# Altium PCB ver2.PcbDoc
Units mil, origin at the board's own origin, x right, y up, seen from the top; angles counter-clockwise.
Board outline 1725 x 2820 mil, 2 copper layers (Top Layer, Bottom Layer); 67 components, 39 nets, 250 pads, 7 vias.
Unrouted connection lines stored in the file: 7.
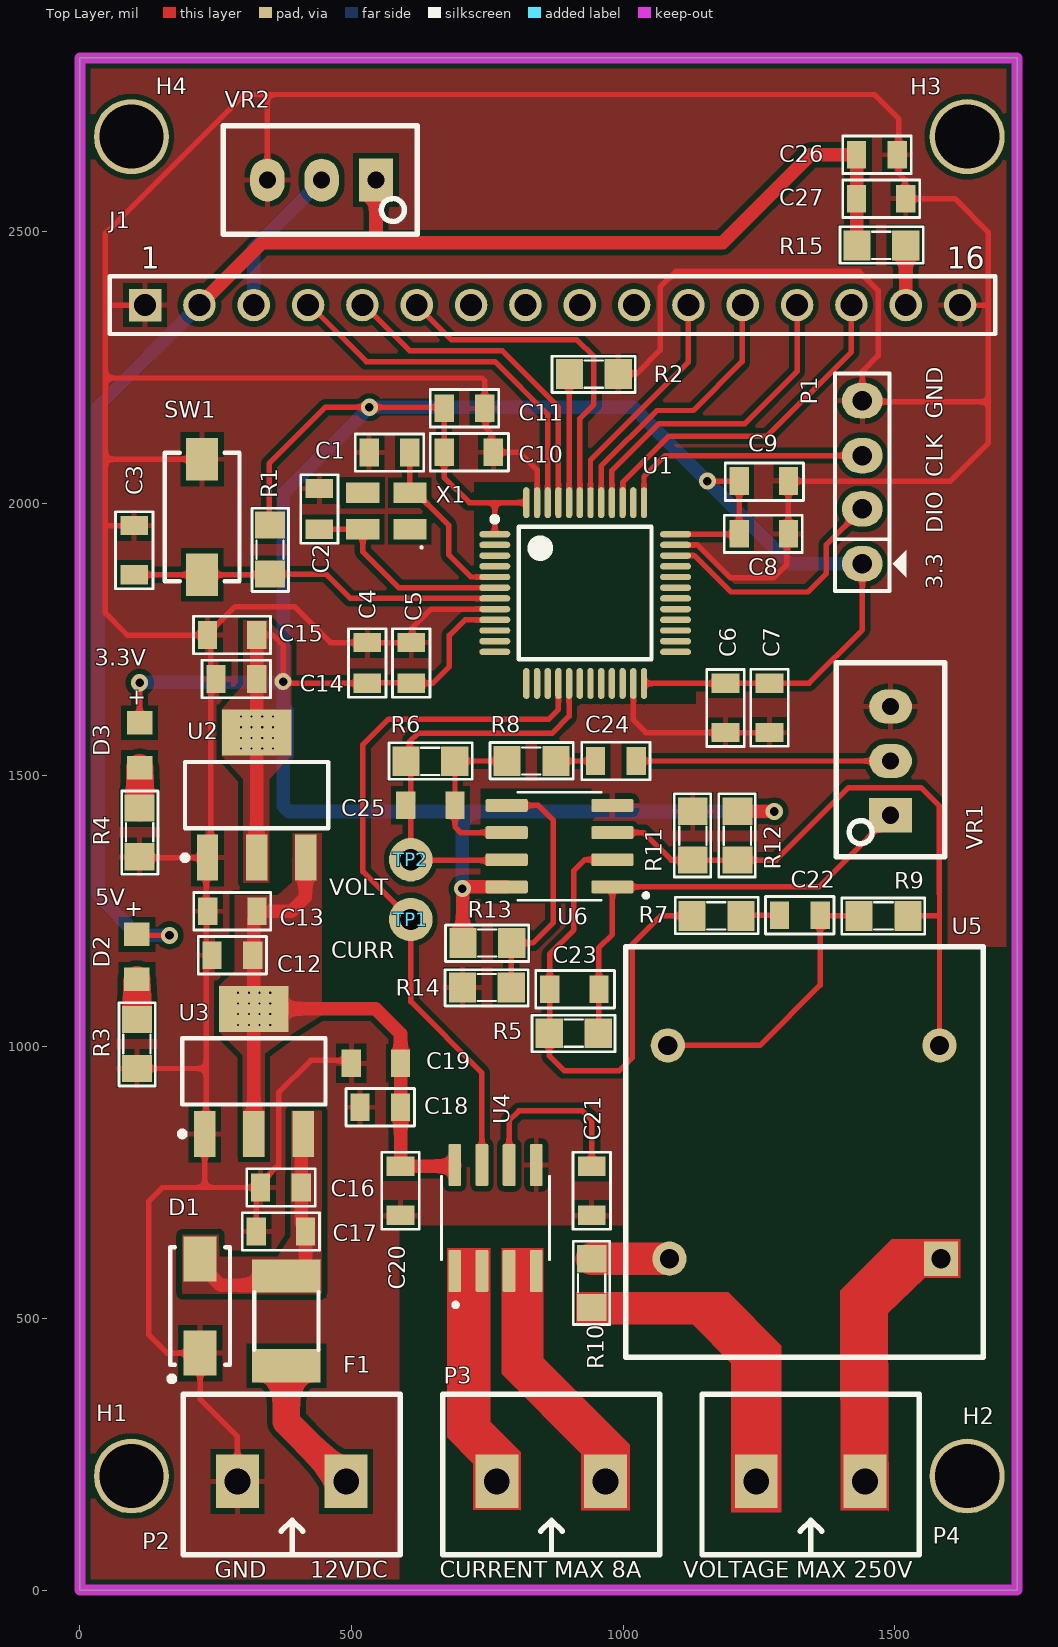
[diagram p0: Top Layer view]
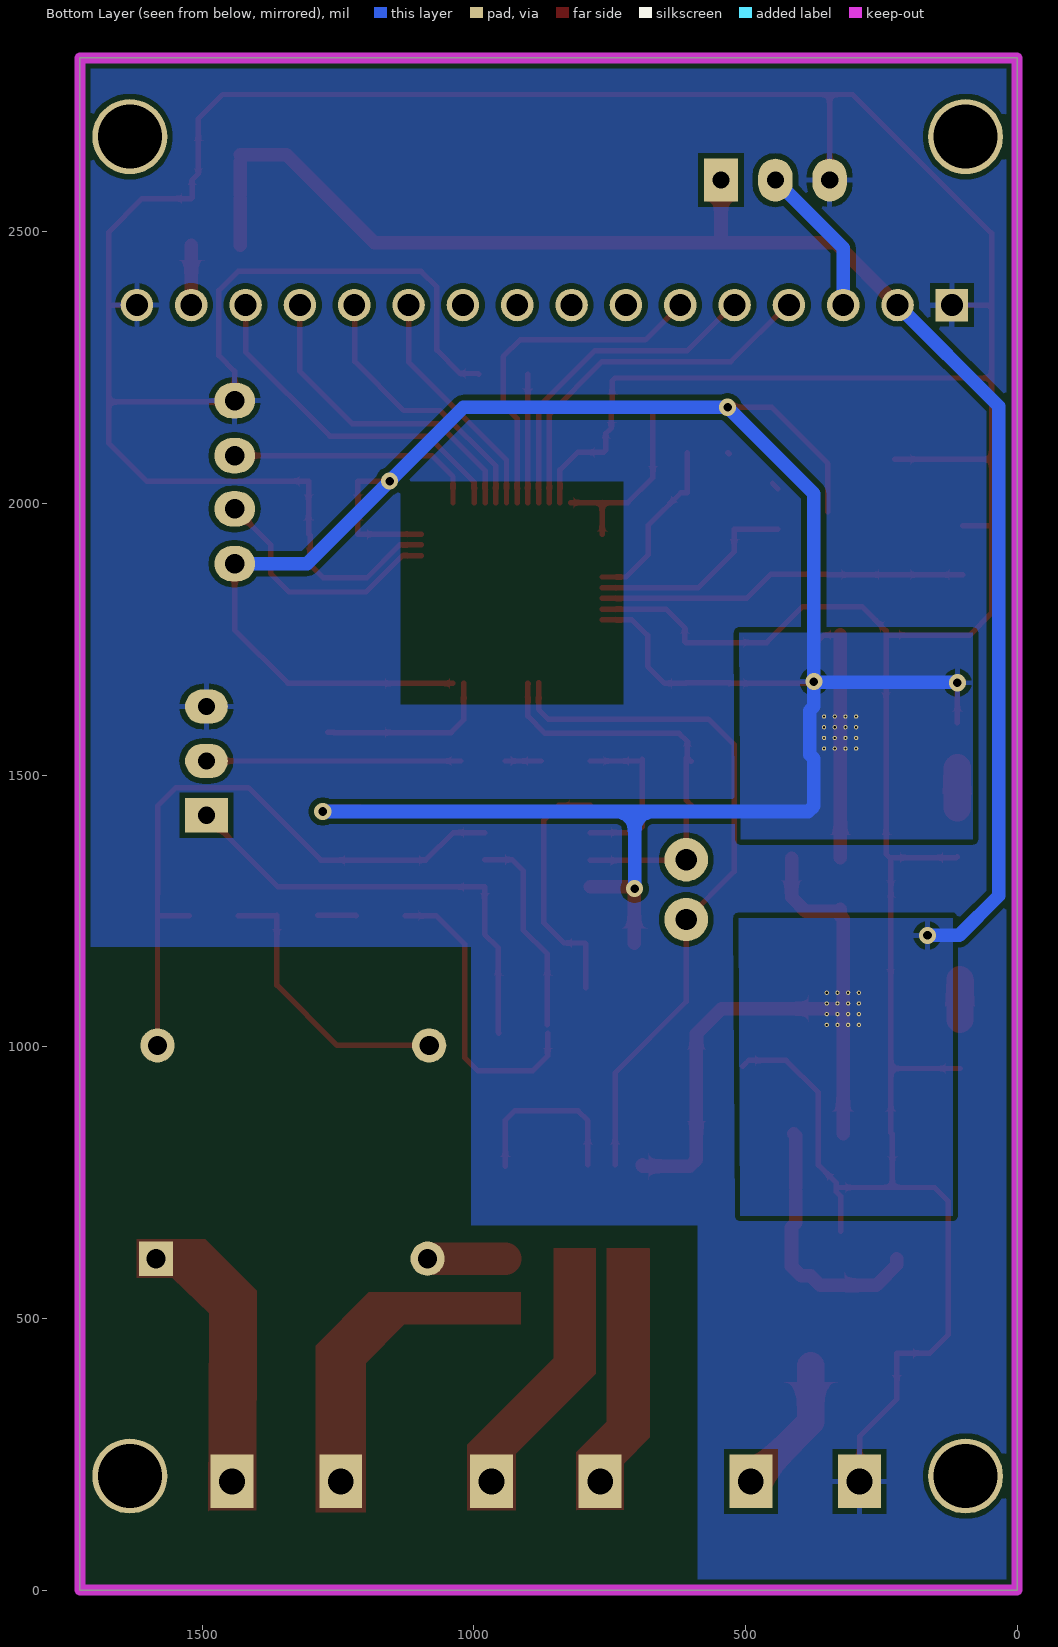
[diagram p1: Bottom Layer view, seen from below]
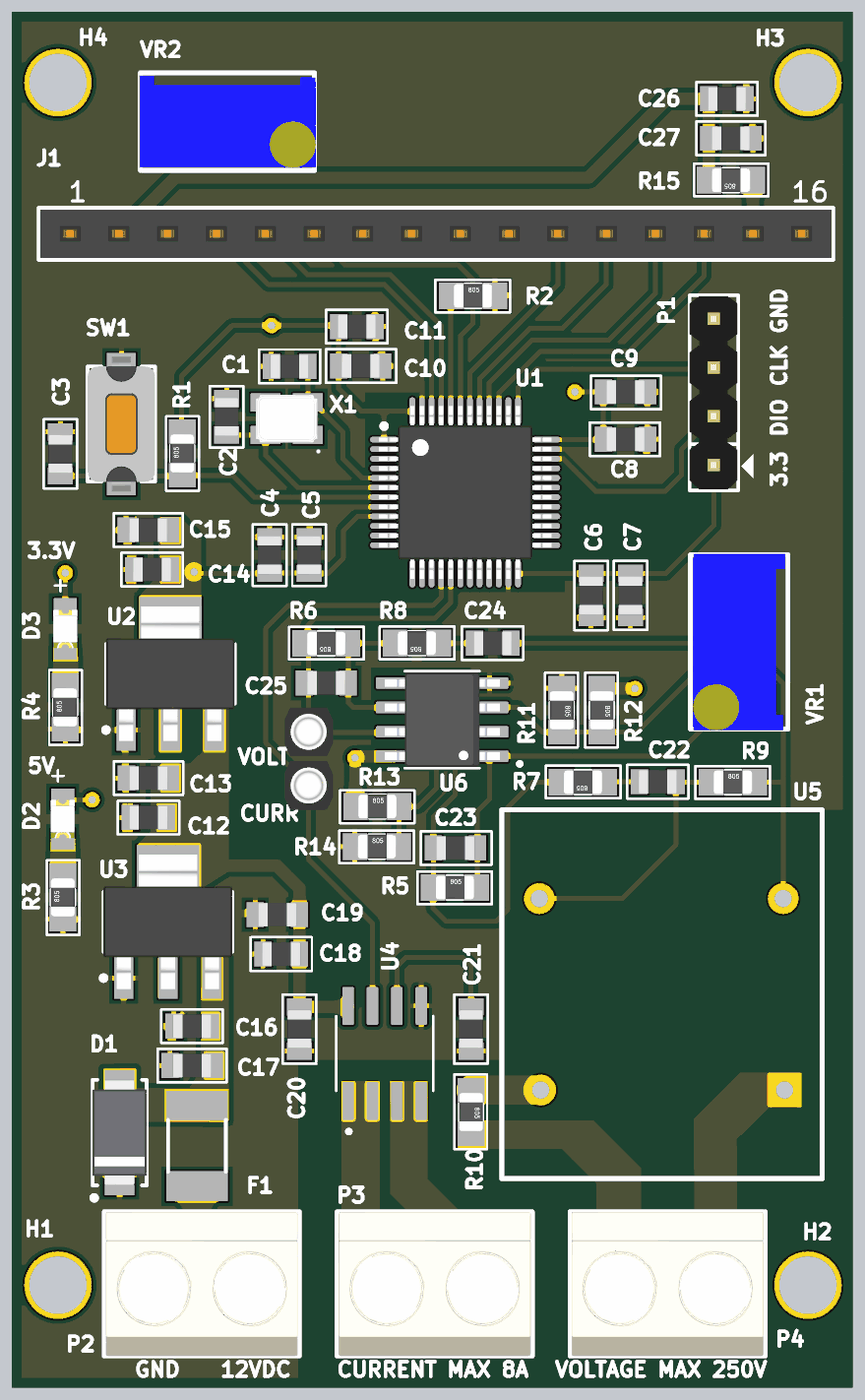
[diagram p2: 3D render of the assembled board from above, using the file's embedded part models]

## Layer stack, top to bottom
Top Solder: solder mask 0.4, Solder Resist, Dk 3.5
Top Layer: signal copper 1.4
Dielectric 1: dielectric 12.6, FR-4, Dk 4.8
Bottom Layer: signal copper 1.4
Bottom Solder: solder mask 0.4, Solder Resist, Dk 3.5

## Board outline
0,0 0,2820 1725,2820 1725,0

## Design rules (kind name [scope] priority, off if disabled: settings)
Clearance [All] p1: gap=10 ignorepadtopadclearanceinfootprint=TRUE
PolygonConnect PolygonConnect_14 [All vs IsNamedPolygon('NETP3_1_L01_P001')] p1: thpad.connectstyle=Direct thpad.reliefconductorwidth=10 thpad.reliefentries=4 thpad.polygonreliefangle="90 Angle" thpad.airgapwidth=10 smdpad.connectstyle=Direct smdpad.reliefconductorwidth=10 smdpad.reliefentries=4 smdpad.polygonreliefangle="90 Angle" smdpad.airgapwidth=10 via.connectstyle=Relief via.reliefconductorwidth=10 via.reliefentries=4 via.polygonreliefangle="90 Angle" via.airgapwidth=10
PolygonConnect PolygonConnect_13 [All vs IsNamedPolygon('+3.3_L01_P012')] p2: thpad.connectstyle=Relief thpad.reliefconductorwidth=10 thpad.reliefentries=4 thpad.polygonreliefangle="90 Angle" thpad.airgapwidth=10 smdpad.connectstyle=Direct smdpad.reliefconductorwidth=10 smdpad.reliefentries=4 smdpad.polygonreliefangle="90 Angle" smdpad.airgapwidth=10 via.connectstyle=Direct via.reliefconductorwidth=10 via.reliefentries=4 via.polygonreliefangle="90 Angle" via.airgapwidth=10
PolygonConnect PolygonConnect_12 [All vs IsNamedPolygon('+5_L01_P011')] p3: thpad.connectstyle=Relief thpad.reliefconductorwidth=10 thpad.reliefentries=4 thpad.polygonreliefangle="90 Angle" thpad.airgapwidth=10 smdpad.connectstyle=Direct smdpad.reliefconductorwidth=10 smdpad.reliefentries=4 smdpad.polygonreliefangle="90 Angle" smdpad.airgapwidth=10 via.connectstyle=Relief via.reliefconductorwidth=10 via.reliefentries=4 via.polygonreliefangle="90 Angle" via.airgapwidth=10
PolygonConnect PolygonConnect_11 [All vs IsNamedPolygon('+5_L01_P011')] p4: thpad.connectstyle=Relief thpad.reliefconductorwidth=10 thpad.reliefentries=4 thpad.polygonreliefangle="90 Angle" thpad.airgapwidth=10 smdpad.connectstyle=Direct smdpad.reliefconductorwidth=10 smdpad.reliefentries=4 smdpad.polygonreliefangle="90 Angle" smdpad.airgapwidth=10 via.connectstyle=Relief via.reliefconductorwidth=10 via.reliefentries=4 via.polygonreliefangle="90 Angle" via.airgapwidth=10
PolygonConnect PolygonConnect_10 [All vs IsNamedPolygon('VCC_9-12_L01_P010')] p5: thpad.connectstyle=Relief thpad.reliefconductorwidth=10 thpad.reliefentries=4 thpad.polygonreliefangle="90 Angle" thpad.airgapwidth=10 smdpad.connectstyle=Direct smdpad.reliefconductorwidth=10 smdpad.reliefentries=4 smdpad.polygonreliefangle="90 Angle" smdpad.airgapwidth=10 via.connectstyle=Relief via.reliefconductorwidth=10 via.reliefentries=4 via.polygonreliefangle="90 Angle" via.airgapwidth=10
PolygonConnect PolygonConnect_9 [All vs IsNamedPolygon('NETP3_2_L01_P000')] p6: thpad.connectstyle=Direct thpad.reliefconductorwidth=10 thpad.reliefentries=4 thpad.polygonreliefangle="90 Angle" thpad.airgapwidth=10 smdpad.connectstyle=Direct smdpad.reliefconductorwidth=10 smdpad.reliefentries=4 smdpad.polygonreliefangle="90 Angle" smdpad.airgapwidth=10 via.connectstyle=Relief via.reliefconductorwidth=10 via.reliefentries=4 via.polygonreliefangle="90 Angle" via.airgapwidth=10
PolygonConnect PolygonConnect_8 [All vs IsNamedPolygon('NETP3_2_L01_P000')] p7: thpad.connectstyle=Direct thpad.reliefconductorwidth=10 thpad.reliefentries=4 thpad.polygonreliefangle="90 Angle" thpad.airgapwidth=10 smdpad.connectstyle=Direct smdpad.reliefconductorwidth=10 smdpad.reliefentries=4 smdpad.polygonreliefangle="90 Angle" smdpad.airgapwidth=10 via.connectstyle=Relief via.reliefconductorwidth=10 via.reliefentries=4 via.polygonreliefangle="90 Angle" via.airgapwidth=10
PolygonConnect PolygonConnect_7 [All vs IsNamedPolygon('NETP4_2_L01_P009')] p8: thpad.connectstyle=Direct thpad.reliefconductorwidth=10 thpad.reliefentries=4 thpad.polygonreliefangle="90 Angle" thpad.airgapwidth=10 smdpad.connectstyle=Direct smdpad.reliefconductorwidth=10 smdpad.reliefentries=4 smdpad.polygonreliefangle="90 Angle" smdpad.airgapwidth=10 via.connectstyle=Relief via.reliefconductorwidth=10 via.reliefentries=4 via.polygonreliefangle="90 Angle" via.airgapwidth=10
PolygonConnect PolygonConnect_6 [All vs IsNamedPolygon('NETP4_1_L01_P008')] p9: thpad.connectstyle=Direct thpad.reliefconductorwidth=10 thpad.reliefentries=4 thpad.polygonreliefangle="90 Angle" thpad.airgapwidth=10 smdpad.connectstyle=Relief smdpad.reliefconductorwidth=10 smdpad.reliefentries=4 smdpad.polygonreliefangle="90 Angle" smdpad.airgapwidth=10 via.connectstyle=Relief via.reliefconductorwidth=10 via.reliefentries=4 via.polygonreliefangle="90 Angle" via.airgapwidth=10
PolygonConnect PolygonConnect_5 [All vs IsNamedPolygon('+3.3_L02_P006')] p10: thpad.connectstyle=Direct thpad.reliefconductorwidth=10 thpad.reliefentries=4 thpad.polygonreliefangle="90 Angle" thpad.airgapwidth=10 smdpad.connectstyle=Relief smdpad.reliefconductorwidth=10 smdpad.reliefentries=4 smdpad.polygonreliefangle="90 Angle" smdpad.airgapwidth=10 via.connectstyle=Relief via.reliefconductorwidth=10 via.reliefentries=4 via.polygonreliefangle="90 Angle" via.airgapwidth=10
PolygonConnect PolygonConnect_4 [All vs IsNamedPolygon('+5_L02_P005')] p11: thpad.connectstyle=Direct thpad.reliefconductorwidth=10 thpad.reliefentries=4 thpad.polygonreliefangle="90 Angle" thpad.airgapwidth=10 smdpad.connectstyle=Relief smdpad.reliefconductorwidth=10 smdpad.reliefentries=4 smdpad.polygonreliefangle="90 Angle" smdpad.airgapwidth=10 via.connectstyle=Relief via.reliefconductorwidth=10 via.reliefentries=4 via.polygonreliefangle="90 Angle" via.airgapwidth=10
PolygonConnect PolygonConnect_3 [All vs IsNamedPolygon('+5_L02_P005')] p12: thpad.connectstyle=Relief thpad.reliefconductorwidth=10 thpad.reliefentries=4 thpad.polygonreliefangle="90 Angle" thpad.airgapwidth=10 smdpad.connectstyle=Relief smdpad.reliefconductorwidth=10 smdpad.reliefentries=4 smdpad.polygonreliefangle="90 Angle" smdpad.airgapwidth=10 via.connectstyle=Direct via.reliefconductorwidth=10 via.reliefentries=4 via.polygonreliefangle="90 Angle" via.airgapwidth=10
PolygonConnect PolygonConnect_2 [All vs IsNamedPolygon('NONET_L01_P001')] p13: thpad.connectstyle=Direct thpad.reliefconductorwidth=10 thpad.reliefentries=4 thpad.polygonreliefangle="90 Angle" thpad.airgapwidth=10 smdpad.connectstyle=Direct smdpad.reliefconductorwidth=10 smdpad.reliefentries=4 smdpad.polygonreliefangle="90 Angle" smdpad.airgapwidth=10 via.connectstyle=Relief via.reliefconductorwidth=10 via.reliefentries=4 via.polygonreliefangle="90 Angle" via.airgapwidth=10
PolygonConnect PolygonConnect_1 [All vs IsNamedPolygon('NONET_L01_P000')] p14: thpad.connectstyle=Direct thpad.reliefconductorwidth=10 thpad.reliefentries=4 thpad.polygonreliefangle="90 Angle" thpad.airgapwidth=10 smdpad.connectstyle=Direct smdpad.reliefconductorwidth=10 smdpad.reliefentries=4 smdpad.polygonreliefangle="90 Angle" smdpad.airgapwidth=10 via.connectstyle=Relief via.reliefconductorwidth=10 via.reliefentries=4 via.polygonreliefangle="90 Angle" via.airgapwidth=10
PolygonConnect [All] p15: connectstyle=Relief reliefconductorwidth=10 reliefentries=4 polygonreliefangle="90 Angle" airgapwidth=10
RoutingVias [All] p1: holewidth=15.75 width=31.5 viastyle="Through Hole" minholewidth=15.75 minwidth=31.5 maxholewidth=15.75 maxwidth=31.5
SolderMaskExpansion [All] p1: expansion=4 istentingtop=FALSE
Width [All] p1: maxlimit=60 minlimit=10 preferedwidth=25
30 further rules are at their usual default settings.

## Classes and differential pairs
component class Power_Supply: C12 C13 C14 C15 C16 C17 C18 C19 D1 D2 D3 F1 P2 R3 R4 U2 U3
component class Measure: C20 C21 C22 C23 C24 C25 P3 P4 R5 R6 R7 R8 R9 R10 R11 R12 R13 R14 U4 U5 U6 VR1
component class MCU: C1 C2 C3 C4 C5 C6 C7 C8 C9 C10 C11 H1 H2 H3 H4 P1 R1 R2 SW1 TP1 TP2 X1
component class Display: C26 C27 J1 R15 VR2

## Components (designator, comment, footprint, x,y, rotation, side; value= is the part's Value field where it differs from the comment)
C1 "22pF, 50V" WCAP-CSGP_0805_H=0.6mm_Reflow 569.91,2093.45 r0 top
C2 "22pF, 50V" WCAP-CSGP_0805_H=0.6mm_Reflow 440.74,1989.94 r270 top
C3 "100nF, 50V" WCAP-CSGP_0805_H=0.8mm_Wave 100,1913.98 r270 top
C4 "1uF, 50V" WCAP-CSGP_0805_H=1.25mm 529.03,1706.41 r270 top
C5 "10nF, 50V" WCAP-CSGP_0805_H=0.8mm_Reflow 609.9,1706.41 r270 top
C6 "100nF, 50V" WCAP-CSGP_0805_H=0.8mm_Wave 1188.28,1623.54 r90 top
C7 "100nF, 50V" WCAP-CSGP_0805_H=0.8mm_Wave 1269.15,1623.82 r90 top
C8 "100nF, 50V" WCAP-CSGP_0805_H=0.8mm_Wave 1258.75,1944 r180 top
C9 "100nF, 50V" WCAP-CSGP_0805_H=0.8mm_Wave 1258.75,2041 r180 top
C10 "100nF, 50V" WCAP-CSGP_0805_H=0.8mm_Wave 715.74,2094.12 r180 top
C11 "10uF, 16V" WCAP-CSGP_0805_H=1.25mm 707.87,2175 r180 top
C12 "4.7uF, 25V" WCAP-CSGP_0805_H=1.25mm 280.66,1168.51 r0 top
C13 "100nF, 50V" WCAP-CSGP_0805_H=0.8mm_Wave 280.66,1249.39 r0 top
C14 "4.7uF, 25V" WCAP-CSGP_0805_H=1.25mm 287.98,1676.89 r0 top
C15 "100nF, 50V" WCAP-CSGP_0805_H=0.8mm_Wave 280.11,1757.76 r0 top
C16 "4.7uF, 25V" WCAP-CSGP_0805_H=1.25mm 370,741.01 r0 top
C17 "100nF, 50V" WCAP-CSGP_0805_H=0.8mm_Wave 370,660.13 r0 top
C18 "4.7uF, 25V" WCAP-CSGP_0805_H=1.25mm 552.83,888.75 r0 top
C19 "100nF, 50V" WCAP-CSGP_0805_H=0.8mm_Wave 544.96,969.63 r0 top
C20 "100nF, 50V" WCAP-CSGP_0805_H=0.8mm_Wave 590.24,735 r90 top
C21 "1nF, 50V" WCAP-CSGP_0805_H=0.8mm_Wave 942,735 r270 top
C22 "1uF, 50V" WCAP-CSGP_0805_H=1.25mm 1325,1242 r180 top
C23 "1nF, 50V" WCAP-CSGP_0805_H=0.8mm_Wave 910,1105.94 r0 top
C24 "1uF, 50V" WCAP-CSGP_0805_H=1.25mm 986.49,1526 r0 top
C25 "1nF, 50V" WCAP-CSGP_0805_H=0.8mm_Wave 645.08,1444.5 r0 top
C26 "4.7uF, 25V" WCAP-CSGP_0805_H=1.25mm 1466.85,2641.66 r180 top
C27 "100nF, 50V" WCAP-CSGP_0805_H=0.8mm_Wave 1474.72,2560.79 r180 top
D1 "D Schottky" SS34 221.39,522.86 r90 top
D2 "Red, 2V" WL-SMCW_0805 105,1165.36 r90 top
D3 "Green, 3.2V" WL-SMCW_0805 110,1555 r90 top
F1 "Fuse" "FUSE SMD" 380,495.6 r90 top
H1 "Hole" "LO KHOAN 3MM" 95,210 r0 top
H2 "Hole" "LO KHOAN 3MM" 1633.01,210 r0 top
H3 "Hole" "LO KHOAN 3MM" 1633.01,2675 r0 top
H4 "Hole" "LO KHOAN 3MM" 95,2675 r0 top
J1 "61301611821" 61301611821 870,2365 r0 top
P1 "Header 4" JP4 1440,1989 r90 top
P2 "Domino 2" "DOMINO 2- 5mm" 390,200 r180 top
P3 "Domino 2" "DOMINO 2- 5mm" 867.5,200 r180 top
P4 "Domino 2" "DOMINO 2- 5mm" 1345,200 r180 top
R1 "RESISTOR SMD" RES-SM-0805 350,1870 r90 top value=10K/1%/0805
R2 "RESISTOR SMD" RES-SM-0805 901,2238 r0 top value=10K/1%/0805
R3 "RESISTOR SMD" RES-SM-0805 105,960 r90 top value=1k/1%/0805
R4 "RESISTOR SMD" RES-SM-0805 110,1349.64 r90 top value=470/1%/0805
R5 "RESISTOR SMD" RES-SM-0805 864,1025 r0 top value=100k/1%/0805
R6 "RESISTOR SMD" RES-SM-0805 690.1,1525.45 r180 top value=10k/1%/0805
R7 "RESISTOR SMD" RES-SM-0805 1216.51,1241 r180 top value=10k/1%/0805
R8 "RESISTOR SMD" RES-SM-0805 876,1526 r180 top value=10k/1%/0805
R9 "RESISTOR SMD" RES-SM-0805 1434,1241 r0 top value=100/1%/0805
R10 "RESISTOR SMD" RES-SM-0805 942,610 r270 top value=820K/5%/0805
R11 "RESISTOR SMD" RES-SM-0805 1210.01,1433.49 r270 top value=10k/1%/0805
R12 "RESISTOR SMD" RES-SM-0805 1128,1433.49 r270 top value=10k/1%/0805
R13 "RESISTOR SMD" RES-SM-0805 705,1191 r0 top value=10k/1%/0805
R14 "RESISTOR SMD" RES-SM-0805 704,1108.99 r0 top value=10k/1%/0805
R15 "RESISTOR SMD" RES-SM-0805 1520,2475 r180 top value=330/1%/0805
SW1 "434123050816" WS-TASV_L6W3.5H5_4341x30508x6 225,1975 r90 top
TP1 "Test Point" TP 609,1234.23 r0 top
TP2 "Test Point" TP 609,1344.24 r0 top
U1 "STM32F103C8T6" TSQFP50P900X900X160-48N 930,1835 r0 top
U2 "AMS1117-3.3V" SOT230P700X180-4N 325.38,1463.14 r90 top
U3 "AMS1117-5V" SOT230P700X180-4N 320.38,954.76 r90 top
U4 "ACS712-20" SOIC127P600X175-8N 765,685 r90 top
U5 "ZMPT101B" ZMPT101B 1333.56,806.26 r270 top
U6 "TL072" DIP794W45P254L1060H508Q8 882.79,1369.24 r180 top
VR1 "10K" "VARISTOR 2" 1492,1526 r90 top value="VR 100K"
VR2 "10K" "VARISTOR 2" 445,2595 r180 top value="VR 10K"
X1 "XTAL/8MHz/3225" "XTAL 3225" 564,1986 r180 top value=16MHz

## Footprints (in the part's own frame and the unit in brackets; to place one, negate y for a bottom-side part, rotate by r counter-clockwise, add the part's x,y. Pads: shape width x height; smd on the part's side, far side on the other; paste and mask are expansions set on the pad)
61301611821 [mm] "Socket Header, Pitch 2.54 mm, THT, Vertical, single row, 16p"
  rect 1.52x1.52 hole 1.02: 1(-19.05,0)
  round 1.52 hole 1.02: 2(-16.51,0) 3(-13.97,0) 4(-11.43,0) 5(-8.89,0) 6(-6.35,0) 7(-3.81,0) 8(-1.27,0) 9(1.27,0) 10(3.81,0) 11(6.35,0) 12(8.89,0) 13(11.43,0) 14(13.97,0) 15(16.51,0) 16(19.05,0)
  silkscreen extent -20.7,-1.35 20.7,1.35, body extent -20.57,-1.25 20.57,1.25, height 8.55
DIP794W45P254L1060H508Q8 [mm]
  rrect25% 1.97x0.6 smd: 1(-2.47,1.905) 2(-2.47,0.635) 3(-2.47,-0.635) 4(-2.47,-1.905) 5(2.47,-1.905) 6(2.47,-0.635) 7(2.47,0.635) 8(2.47,1.905)
  silkscreen extent -4.14,-2.52 1.95,2.52, body extent -3,-2.45 3,2.45, height 1.75
"DOMINO 2- 5mm" [mm]
  rect 2x2.5 hole 1.2: 1(-2.54,0) 2(2.54,0)
  silkscreen extent -5.08,-4.08 5.08,3.43, body extent -5,-4.07 5,3.43, height 10
"FUSE SMD" [mm] "SMD FUSE"
  rect 1.55x3.21 smd: 1(-2.1,0) 2(2.1,0)
  silkscreen extent -1.35,-1.5 1.35,1.51, body extent -2.37,-1.71 2.36,1.71, height 0.75
JP4 [mil] "Jumper 4"
  oval 65x75 hole 36: 1(-100,0) 2(1,0) 3(99,0) 4(200,0)
  silkscreen extent -150,-81 250,50, body extent -148,-48 248,50, height 323
"LO KHOAN 3MM" [mil]
  round 138 hole 118.1: 1(0,0)
RES-SM-0805 [mil]
  rect 50x55 smd: 1(0,0) 2(90,0)
  silkscreen extent -32,-34 121,33, body extent 6,-25 84,25, height 31
SOIC127P600X175-8N [mm]
  rrect25% 1.97x0.6 smd: 1(-2.475,1.905) 2(-2.475,0.635) 3(-2.475,-0.635) 4(-2.475,-1.905) 5(2.475,-1.905) 6(2.475,-0.635) 7(2.475,0.635) 8(2.475,1.905)
  silkscreen extent -4.16,-2.52 1.95,2.52
SOT230P700X180-4N [mm] "SOT223, 4-Leads, Body 6.50x7.00mm (avg), Pitch 2.30mm, IPC Medium Density"
  rect 2.15x1 smd: 1(-2.925,2.3) 2(-2.925,0) 3(-2.925,-2.3)
  round 0.2 hole 0.1 paste+0 mask+0.102: 4(2.175,-0.762) 4(2.175,-0.262) 4(2.175,0.238) 4(2.175,0.738) 4(2.675,-0.762) 4(2.675,-0.762) 4(2.675,-0.262) 4(2.675,0.238) 4(2.675,0.738) 4(3.175,-0.762) 4(3.175,-0.762) 4(3.175,-0.262) 4(3.175,0.238) 4(3.175,0.738) 4(3.675,-0.762) 4(3.675,-0.762) 4(3.675,-0.262) 4(3.675,0.238) 4(3.675,0.738)
  rect 2.15x3.25 smd: 4(2.925,0)
  silkscreen extent -3.05,-3.35 1.55,3.47, body extent -3.5,-3.35 3.5,3.35, height 1.8
SS34 [mm] "DO-214-AC/SMA Molded Diode, Body 5.3x2.6mm, IPC Medium Density"
  rect 2.1x1.55 smd: A(-2.2,0) K(2.2,0)
  silkscreen extent -3.52,-1.4 2.75,1.45, body extent -2.75,-1.4 2.75,1.4, height 2.3
TP [mil] "Connect 1"
  round 80 hole 39: TP1(0,0)
  body extent -50,-50 50,50, height 179
TSQFP50P900X900X160-48N [mm] "TSQFP, 48-Leads, Body 7.00x7.00mm, Pitch 0.50mm, IPC Medium Density"
  oval 1.45x0.3 smd: 1(-4.225,2.75) 2(-4.225,2.25) 3(-4.225,1.75) 4(-4.225,1.25) 5(-4.225,0.75) 6(-4.225,0.25) 7(-4.225,-0.25) 8(-4.225,-0.75) 9(-4.225,-1.25) 10(-4.225,-1.75) 11(-4.225,-2.25) 12(-4.225,-2.75) 25(4.225,-2.75) 26(4.225,-2.25) 27(4.225,-1.75) 28(4.225,-1.25) 29(4.225,-0.75) 30(4.225,-0.25) 31(4.225,0.25) 32(4.225,0.75) 33(4.225,1.25) 34(4.225,1.75) 35(4.225,2.25) 36(4.225,2.75)
  oval 0.3x1.45 smd: 13(-2.75,-4.225) 14(-2.25,-4.225) 15(-1.75,-4.225) 16(-1.25,-4.225) 17(-0.75,-4.225) 18(-0.25,-4.225) 19(0.25,-4.225) 20(0.75,-4.225) 21(1.25,-4.225) 22(1.75,-4.225) 23(2.25,-4.225) 24(2.75,-4.225) 37(2.75,4.225) 38(2.25,4.225) 39(1.75,4.225) 40(1.25,4.225) 41(0.75,4.225) 42(0.25,4.225) 43(-0.25,4.225) 44(-0.75,4.225) 45(-1.25,4.225) 46(-1.75,4.225) 47(-2.25,4.225) 48(-2.75,4.225)
  silkscreen extent -4.35,-3.1 3.1,3.57, body extent -4.5,-4.5 4.5,4.5, height 1.6
"VARISTOR 2" [mm] "Resistor Variable"
  rect 1.6x2 hole 0.8: 1(-2.54,0)
  oval 1.6x2 hole 0.8: 2(0,0) 3(2.54,0)
  silkscreen extent -4.47,-2.54 4.6,2.54, body extent -4.54,-2.4 4.66,2.4, height 12.02
WCAP-CSGP_0805_H=0.6mm_Reflow [mm] "Ceramic Capacitors, body 2x1.25mm"
  rect 0.9x1.3 smd: 1(-0.95,0) 2(0.95,0)
  body extent -1,-0.62 1,0.63, height 0.6
WCAP-CSGP_0805_H=0.8mm_Reflow [mm] "Ceramic Capacitors, body 2x1.25mm"
  rect 0.9x1.3 smd: 1(-0.95,0) 2(0.95,0)
  body extent -1,-0.62 1,0.63, height 0.8
WCAP-CSGP_0805_H=0.8mm_Wave [mm] "Ceramic Capacitors, body 2x1.25mm"
  rect 0.9x1.3 smd: 1(-1.15,0) 2(1.15,0)
  body extent -1,-0.62 1,0.63, height 0.8
WCAP-CSGP_0805_H=1.25mm [mm] "Ceramic Capacitors, body 2x1.25mm"
  rect 0.9x1.3 smd: 1(-0.95,0) 2(0.95,0)
  body extent -1,-0.62 1,0.63, height 1.25
WL-SMCW_0805 [mm] "SMD Mono-color Chip LED, body 2.0x1.25mm"
  rect 1.1x1.2 smd: 1(-1.05,0) 2(1.05,0)
  body extent -1,-0.63 1,0.62, height 0.7
WS-TASV_L6W3.5H5_4341x30508x6 [mm] "SMD Tact Switch, body 6x3.5mm"
  rect 2x1.5 smd: 1(-2.7,0) 2(2.7,0)
  silkscreen extent -3,-1.75 3,1.75, body extent -3.65,-1.75 3.65,1.75, height 5
"XTAL 3225" [mm]
  rect 1.55x0.95 smd: 1(-1.1,-0.85) 2(1.1,-0.85) 3(1.1,0.85) 4(-1.1,0.85)
  silkscreen extent -1.7,1.65 -1.6,1.75, body extent -1.6,-1.25 1.6,1.25, height 0.55
ZMPT101B [mm]
  rect 1.6x1.6 hole 0.9: 1(4.985,6.387)
  round 1.6 hole 0.9: 2(4.985,-6.313) 3(-4.985,-6.387) 4(-4.985,6.313)
  silkscreen extent -9.6,-8.35 9.6,8.35

## Part data
C1 C2: library part 885012007053, "WCAP-CSGP Multilayer Ceramic Chip Capacitor, General Purpose, size 0805, NP0, 22pF, 50V", Capacitance=22pF, Capacitance Tolerance=+/-5%, Isolation Resistance=>=10GOhm, Manufacturer="Wurth Elektronik", Operating Temperature="-55 to +125degC", Rated Voltage=50VDC, Ceramic Type=NP0, ComponentLink1Description=Manufacturer, ComponentLink1URL=http://www.we-online.de, ComponentLink2Description=Datasheet, ComponentLink2URL=https://www.we-online.com/catalog/datasheet/885012007053.pdf, Dissipation Factor=Q>=400+20C, Height=0.6mm, Manufacturer Part Number=885012007053, Mounting Technology=SMT, Packaging="Tape and Reel", Published Date="May 2020", Size=0805, Technical Reference=NP00805220J050DFCT10000
C3 C6 C7 C8 C9 C10 C13 C15 C17 C19 C20 C27: library part 885012207098, "WCAP-CSGP Multilayer Ceramic Chip Capacitor, General Purpose, size 0805, X7R, 100nF, 50V", Capacitance=100nF, Capacitance Tolerance=+/-10%, Isolation Resistance=>=5GOhm, Manufacturer="Wurth Elektronik", Operating Temperature="-55 to +125degC", Rated Voltage=50VDC, Ceramic Type=X7R, ComponentLink1Description=Manufacturer, ComponentLink1URL=http://www.we-online.de, ComponentLink2Description=Datasheet, ComponentLink2URL=https://www.we-online.com/catalog/datasheet/885012207098.pdf, Dissipation Factor=#NAME?, Height=0.8mm, Manufacturer Part Number=885012207098, Mounting Technology=SMT, Packaging="Tape and Reel", Published Date="May 2020", Size=0805, Technical Reference=X7R0805104K050DFCT10000
C4 C22 C24: library part 885012207103, "WCAP-CSGP Multilayer Ceramic Chip Capacitor, General Purpose, size 0805, X7R, 1uF, 50V", Capacitance=1uF, Capacitance Tolerance=+/-10%, Isolation Resistance=>=0.1GOhm, Manufacturer="Wurth Elektronik", Operating Temperature="-55 to +125degC", Rated Voltage=50VDC, Ceramic Type=X7R, ComponentLink1Description=Manufacturer, ComponentLink1URL=http://www.we-online.de, ComponentLink2Description=Datasheet, ComponentLink2URL=https://www.we-online.com/catalog/datasheet/885012207103.pdf, Dissipation Factor=#NAME?, Height=1.25mm, Manufacturer Part Number=885012207103, Mounting Technology=SMT, Packaging="Tape and Reel", Published Date="May 2020", Size=0805, Technical Reference=X7R0805105K050DFCT10000
C5: library part 885012207092, "WCAP-CSGP Multilayer Ceramic Chip Capacitor, General Purpose, size 0805, X7R, 10nF, 50V", Capacitance=10nF, Capacitance Tolerance=+/-10%, Isolation Resistance=>=10GOhm, Manufacturer="Wurth Elektronik", Operating Temperature="-55 to +125degC", Rated Voltage=50VDC, Ceramic Type=X7R, ComponentLink1Description=Manufacturer, ComponentLink1URL=http://www.we-online.de, ComponentLink2Description=Datasheet, ComponentLink2URL=https://www.we-online.com/catalog/datasheet/885012207092.pdf, Dissipation Factor=#NAME?, Height=0.8mm, Manufacturer Part Number=885012207092, Mounting Technology=SMT, Packaging="Tape and Reel", Published Date="May 2020", Size=0805, Technical Reference=X7R0805103K050DFCT10000
C11: library part 885012107014, "WCAP-CSGP Multilayer Ceramic Chip Capacitor, General Purpose, size 0805, X5R, 10uF, 16V", Capacitance=10uF, Capacitance Tolerance=+/-20%, Isolation Resistance=>=0.005GOhm, Manufacturer="Wurth Elektronik", Operating Temperature="-55 to +85degC", Rated Voltage=16VDC, Ceramic Type=X5R, ComponentLink1Description=Manufacturer, ComponentLink1URL=http://www.we-online.de, ComponentLink2Description=Datasheet, ComponentLink2URL=https://www.we-online.com/catalog/datasheet/885012107014.pdf, Dissipation Factor=#NAME?, Height=1.25mm, Manufacturer Part Number=885012107014, Mounting Technology=SMT, Packaging="Tape and Reel", Published Date="May 2020", Size=0805, Technical Reference=X5R0805106M016DFCT10000
C12 C14 C16 C18 C26: library part 885012107018, "WCAP-CSGP Multilayer Ceramic Chip Capacitor, General Purpose, size 0805, X5R, 4.7uF, 25V", Capacitance=4.7uF, Capacitance Tolerance=+/-20%, Isolation Resistance=>=0.02GOhm, Manufacturer="Wurth Elektronik", Operating Temperature="-55 to +85degC", Rated Voltage=25VDC, Ceramic Type=X5R, ComponentLink1Description=Manufacturer, ComponentLink1URL=http://www.we-online.de, ComponentLink2Description=Datasheet, ComponentLink2URL=https://www.we-online.com/catalog/datasheet/885012107018.pdf, Dissipation Factor=#NAME?, Height=1.25mm, Manufacturer Part Number=885012107018, Mounting Technology=SMT, Packaging="Tape and Reel", Published Date="May 2020", Size=0805, Technical Reference=X5R0805475M025DFCT10000
C21 C23 C25: library part 885012007063, "WCAP-CSGP Multilayer Ceramic Chip Capacitor, General Purpose, size 0805, NP0, 1nF, 50V", Capacitance=1nF, Capacitance Tolerance=+/-5%, Isolation Resistance=>=10GOhm, Manufacturer="Wurth Elektronik", Operating Temperature="-55 to +125degC", Rated Voltage=50VDC, Ceramic Type=NP0, ComponentLink1Description=Manufacturer, ComponentLink1URL=http://www.we-online.de, ComponentLink2Description=Datasheet, ComponentLink2URL=https://www.we-online.com/catalog/datasheet/885012007063.pdf, Dissipation Factor=Q>=1000, Height=0.8mm, Manufacturer Part Number=885012007063, Mounting Technology=SMT, Packaging="Tape and Reel", Published Date="May 2020", Size=0805, Technical Reference=NP00805102J050DFCT10000
D1: "Schottky Diode", Supplier Part Number 1=SS34, Code_JEDEC=DO-214-AA, LatestRevisionDate=17-Jul-2002, LatestRevisionNote="Re-released for DXP Platform.", PackageDescription="DO-214-AA/SMB; 2 C-Bend Leads; Body 5.3 x 3.6 mm, inc. leads (LxW)", PackageReference=SMB, Published=8-Jun-2000, Publisher="Altium Limited", Supplier 1="Arrow Electronics", Supplier 2=RSComponents, Supplier Part Number 2=8080433
D2: library part 150080RS75000, "WL-SMCW SMT Mono-color Chip LED Waterclear, size 0805, Red, 2V, 140deg", Emitting Color=Red, Forward Voltage typ.=2V, Operating Temperature="-40 to +85degC", Chip Technology=AlInGaP, ComponentLink1Description=Manufacturer, ComponentLink1URL=http://www.we-online.de, ComponentLink2Description=Datasheet, ComponentLink2URL=https://www.we-online.com/catalog/datasheet/150080RS75000.pdf, Dominant Wavelength typ.=625nm, Luminous Intensity typ.=150mcd, Mounting Technology=SMT, Packaging="Tape and Reel", Part Number=150080RS75000, Peak Wavelength typ.=630nm, Published Date="December 2019", Publisher="Wurth Elektronik", Size=0805, Viewing Angle=140deg
D3: library part 150080GS75000, "WL-SMCW SMT Mono-color Chip LED Waterclear, size 0805, Green, 3.2V, 140deg", Emitting Color=Green, Forward Voltage typ.=3.2V, Operating Temperature="-40 to +85degC", Chip Technology=InGaN, ComponentLink1Description=Manufacturer, ComponentLink1URL=http://www.we-online.de, ComponentLink2Description=Datasheet, ComponentLink2URL=https://www.we-online.com/catalog/datasheet/150080GS75000.pdf, Dominant Wavelength typ.=525nm, Luminous Intensity typ.=450mcd, Mounting Technology=SMT, Packaging="Tape and Reel", Part Number=150080GS75000, Peak Wavelength typ.=515nm, Published Date="December 2019", Publisher="Wurth Elektronik", Size=0805, Viewing Angle=140deg
H1 H2 H3 H4: "Hole 3mm"
J1: "WR-PHD Socket Header, THT, pitch 2.54mm, Single Row, Vertical, 16p", Contact Resistance=20mOhm, Manufacturer="Wurth Elektronik", Operating Temperature="-40 to +125degC", Rated Current=3A, Withstanding Voltage=500VAC, Working Voltage=250VAC, ComponentLink1Description=Manufacturer, ComponentLink1URL=http://www.we-online.de, ComponentLink2Description=Datasheet, ComponentLink2URL=https://www.we-online.com/catalog/datasheet/61301611821.pdf, Gender="Socket Header", Manufacturer Part Number=61301611821, Mounting Technology=THT, Orientation=Vertical, Packaging=Tray, Pin Number=16, Pitch=2.54mm, Published Date="May 2020", Row Number=Single
P1: "Header, 4-Pin", LatestRevisionDate=17-Jul-2002, LatestRevisionNote="Re-released for DXP Platform.", Publisher="Altium Limited"
P2 P3 P4: "Domino, 2-Pin", LatestRevisionDate=17-Jul-2002, LatestRevisionNote="Re-released for DXP Platform.", Publisher="Altium Limited"
R1 R2 R3 R4 R5 R6 R7 R8 R9 R10 R11 R12 R13 R14 R15: "Resistor"
SW1: "WS-TASV J-Bend SMT Tact Switch, 12VDC, 50mA, 160g, height 5mm", Actuator Color=Black, Manufacturer="Wurth Elektronik", Operating Temperature max.=85C, Operating Temperature min.=-40C, Rated Current=50mA, Rated Voltage=12V, ComponentLink1Description="Manufacturer Link", ComponentLink1URL=http://www.we-online.de, ComponentLink2Description=Datasheet, ComponentLink2URL=https://www.we-online.com/catalog/datasheet/434123050816.pdf, Contact Material="Stainless Steel", Contact Plating=Silver, Electrical Life=50000Cycles, Height=5mm, Length=6mm, Manufacturer Part Number=434123050816, Mounting Technology=SMT, Operation Force=160g, Packaging="Tape and Reel", Terminal Material="Copper Alloy", Terminal Plating=Silver, Washable=No, Width=3.5mm
U1: Manufacturer=ST, ComponentLink1Description="Supplier 1 Link"
U4: "ACS712: IC de sensor de corriente lineal basado en efecto Hall totalmente integrado con aislamiento de voltaje de 2,1 kV RMS y un conductor de corriente de baja resistencia", Package=None, Availability="In Stock", Check_prices=https://www.snapeda.com/parts/ACS712-20/Analog+Devices/view-part/?ref=eda, MF="Analog Devices", MP=ACS712-20, Price=None, SnapEDA_Link=https://www.snapeda.com/parts/ACS712-20/Analog+Devices/view-part/?ref=snap
U5: "Minuscule 2mA/2mA Precision Voltage Transformer"
U6: "J-FET Amplifier 2 Circuit 8-SO", Package="SOIC-8 STMicroelectronics", Availability=Unavailable, MF=STMicroelectronics, MP=TL072, Price=None, SnapEDA_Link=https://www.snapeda.com/parts/TL072/STMicroelectronics/view-part/1499677/?ref=snap
VR1 VR2: library part "Var Resistor", "Var Resistor"
X1: library part XTAL

## Via types
v1: diameter 31.5, hole 15.75, Top Layer to Bottom Layer, 7 vias

## Nets (pads, with @x,y where several pads share a name; then routed paths per layer and width w, separated by ;. In a path a pad name is that pad's centre, name@x,y a point inside that pad or via, vN(x,y) a via of type N, cw(c..) or ccw(c..) an arc to the next point about the centre after c; other vN are vias at no path point)
+3.3: C4.2 C5.2 C6.2 C7.2 C8.2 C9.2 C10.2 C11.2 C14.2 C15.2 D3.2 P1.1 R1.2 R11.1 R13.1 U1.1 U1.9 U1.24 U1.36 U1.48 U2.2 U2.4 U6.8 | length 6110.4
  Top Layer w10: D3.2 v1(110,1670) ; C15.2@331.79,1757.76 355.24,1757.76 374,1739 v1(374,1672) ; 348.27,1985 348.27,2073.27 452,2177 668.47,2177 C11.2 C10.2 670.47,2047.53 716.66,2001.34 763.66,2001.34 ; v1@376.99,1669.01 C4.2 C4.2@530,1668.04 ; C4.2@529.03,1670 C5.2@610,1670 ; C5.2 649.01,1669.01 680,1700 680,1757 708.79,1785.79 U1.9 ; U1.1 763.66,2001.34 ; U1.48 763.66,2001.34 ; U1.24 1296.15,1668.66 ; U1.36 C8.2@1214,1943.27 ; v1(1155,2041) C9.2 ; C8.2 C9.2 ; C9.2@1214,2041 C9.2 ; 1296.15,1669.1 1342.1,1669.1 1440,1767 P1.1@1440,1882
  Top Layer w25: U2.2 C15.2 ; R13.1 704.5,1191.5 704.5,1290.5 v1(704,1291) 705.76,1291 709,1294.24 U6.8 ; R11.1 1277.51,1433.49 v1(1278,1433)
  Bottom Layer w25: v1(110,1670) 111,1671 373,1671 v1(374,1672) ; v1(704,1291) 704,1433 ; v1(1278,1433) 704,1433 ; P1.1 1307,1889 1019,2177 v1(533,2177) 374,2018 v1(374,1672) ; v1(374,1672) 374,1626.59 381.82,1618.77 381.82,1537.81 374,1529.99 374,1443.25 384.25,1433 704,1433
+5: C12.2 C13.2 C18.2 C19.2 C20.2 C26.2 C27.2 D2.2 J1.2 R15.2 U2.3 U3.2 U3.4 U4.8 VR2.1 | length 4186.8
  Top Layer w10: D2.2 106.7,1205 v1(165,1205)
  Top Layer w25: J1.2 335,2480 547,2480 ; U3.2 U3.4@320.38,1069.92 ; C13.2 389.39,1249.39 415,1275 U2.3@415,1347.04 ; C13.2@325.93,1252.78 325.93,1241.51 320.38,1235.96 U3.4@320.38,1069.92 ; VR2.1@544.77,2594.77 VR2.1 545,2482 547,2480 ; U4.8 690,780.96 689.31,780.28 602.43,780.28 590.24,792.47 C18.2 590.24,1023.76 544.08,1069.92 U3.4@320.38,1069.92 ; C27.2 1429.72,2560.51 1429.72,2475.28 R15.2 ; C27.2@1429.45,2568.66 C26.2@1429.45,2628.57 ; C26.2 1344.66,2641.66 1183,2480 547,2480
  Bottom Layer w10: v1(165,1205) v1@165.5,1205.5
  Bottom Layer w25: v1(165,1205) 107,1205 34,1278 34,2179 J1.2
ADC_CURRENT: TP1.TP1 U1.16 U4.7 | length 1300.2
  Top Layer w10: U4.7 740,952 609,1083 TP1.TP1 521,1322.23 521,1556 568,1603 863,1603 880.79,1620.79 U1.16@880.79,1670.06
ADC_VOLTAGE: C25.1 R6.2 TP2.TP1 U1.17 U6.7 | length 779.8
  Top Layer w10: R6.2 R6.2@606.09,1531.44 ; TP2.TP1 609,1435.31 603.9,1440.41 C25.1 609.1,1453.8 609.1,1531.44 607.09,1533.45 607.09,1562.09 622,1577 869,1577 900.47,1608.47 U1.17@900.47,1668.31 ; TP2.TP1@614,1344.24 615.24,1343 U6.7@785.54,1343 ; U1.17@900.13,1668.31 U1.17
CONTRAST: J1.3 VR2.2 | length 281.8
  Bottom Layer w25: J1.3 320,2470 VR2.2
GND: C1.1 C2.1 C3.1 C4.1 C5.1 C6.1 C7.1 C8.1 C9.1 C10.1 C11.1 C12.1 C13.1 C14.1 C15.1 C16.1 C17.1 C18.1 C19.1 C20.1 C21.2 C26.1 C27.1 D1.A J1.1 J1.16 P1.4 P2.2 R2.2 R3.1 R4.1 R12.1 R14.1 SW1.2 U1.8 U1.23 U1.35 U1.47 U2.1 U3.1 U4.5 U6.4 VR1.3 VR2.3 | length 10103.3
  Top Layer w10: 46.55,2081.3 SW1.2 ; C3.1 47,1959.25 ; R3.1 232.33,960 ; R4.1 111.66,1347.98 U2.1 ; J1.1 52.86,2365 47,2359.14 ; P2.2 290,283 221.39,351.61 D1.A 160.76,436.24 127,470 127,716.16 151.85,741.01 229.83,741.01 ; C17.1 324.72,725.26 332.6,733.13 C16.1 ; VR2.3 345,2752.6 ; C2.1 C2.1@450.25,2036.85 ; C19.1@494.47,975 425,975 366,916 366,782.28 332.6,748.88 C16.1 ; C19.1 C19.1@504.9,964.41 ; C1.1@530.05,2091 C1.1 ; U1.8 646.47,1805.47 611.67,1770.67 611.67,1745.58 C5.1 C4.1 461.18,1743.81 395,1810 285.6,1810 241.24,1765.64 C15.1@241.24,1757.76 ; U1.47 841.42,2061.58 808.88,2094.12 C10.1 757.14,2098 757.14,2128.86 747,2139 747,2173.27 C11.1 745.27,2225.47 739.88,2230.86 47,2230.86 ; R2.2 992.14,2239.14 1025.14,2239.14 1068,2282 1068,2398 1097,2427 1434,2427 1469,2392 1469,2272 1440,2243 P1.4 ; U1.23 1018.58,1601.42 1041.73,1578.27 1257.72,1578.27 1258,1578.54 C7.1 ; U1.35 1136.42,1923.58 1197,1863 1277,1863 1301.27,1887.27 1301.27,1941.24 C8.1 C9.1 1428.13,2041 ccw(c1435,2088) 1435,2040.5 1445,2040.5 ccw(c1445,2088) 1451.87,2041 1602,2041 1672.12,2111.12 1672.12,2187 ; P1.4@1440,2187 1672.12,2187 ; J1.16 1671.12,2365 1672.12,2364 ; 47,1959.25 47,1798 87.24,1757.76 C15.1@241.24,1757.76 ; 47,1959.25 47,2230.86 ; 47,2230.86 47,2359.14 ; 47,2359.14 47,2497 302.6,2752.6 345,2752.6 ; 229.83,741.01 C16.1 ; 229.83,741.01 U3.1 232.33,842.1 232.33,960 ; 232.33,960 232.33,1345.48 U2.1 ; U2.1 241.24,1354.38 C15.1@241.24,1757.76 ; 345,2752.6 1462.4,2752.6 1507,2708 1507,2641.66 1507.07,2641.59 1507.07,2606.93 1518.48,2595.52 1518.48,2562.3 C27.1 1610.21,2560.79 1672.12,2498.88 1672.12,2364 ; 1672.12,2187 1672.12,2364
LCD_D4: J1.11 U1.42 | length 438.3
  Top Layer w10: U1.42 939.84,2079.84 1120,2260 J1.11
LCD_D5: J1.12 U1.41 | length 510.9
  Top Layer w10: U1.41 959.53,2068.53 1062,2171 1129.19,2171 1218.94,2260.75 1218.94,2363.94 J1.12
LCD_D6: J1.13 U1.40 | length 597.4
  Top Layer w10: U1.40 979.21,2060.21 1066,2147 1224,2147 1320,2243 J1.13
LCD_D7: J1.14 U1.39 | length 644.1
  Top Layer w10: U1.39 999.24,2001.68 999.24,2039.24 1084,2124 1265,2124 1420,2279 J1.14
LCD_EN: J1.6 U1.43 | length 644.7
  Top Layer w10: J1.6 684,2301 915,2301 946,2270 946,2182 920.16,2156.16 U1.43
LCD_RS: J1.4 U1.46 | length 687
  Top Layer w10: J1.4 423.09,2365 527.09,2261 764,2261 861.1,2163.9 U1.46
LCD_RW: J1.5 U1.45 | length 614.4
  Top Layer w10: J1.5 523.09,2365 607.09,2281 777,2281 880.79,2177.21 U1.45
NetC21_1: C21.1 U4.6 | length 332.8
  Top Layer w10: U4.6 790,864 808,882 925,882 942,865 C21.1
NetC22_1: C22.1 R9.1 U5.3 | length 526.8
  Top Layer w10: U5.3 1251.53,1002.53 1362.4,1113.4 C22.1 1363.4,1241 R9.1
NetC22_2: C22.2 R7.1 | length 71.5
  Top Layer w10: R7.1 1217.51,1242 C22.2
NetC23_1: C23.1 R5.1 R7.2 U6.2 | length 937.4
  Top Layer w10: R5.1 864,983 891,956 993,956 1017,980 1017,1189 1069,1241 R7.2 ; R5.1@864.72,1040.56 C23.1 864.72,1170.72 909,1215 909,1324 929.24,1344.24 U6.2
NetC23_2: C23.2 R5.2 U6.1 VR1.1 | length 867.4
  Top Layer w10: R5.2 955.28,1026.28 C23.2 955.28,1182.28 980.03,1207.03 U6.1@980.03,1293.12 ; U6.1 1360.24,1294.24 VR1.1 VR1.1@1492,1448
NetC24_1: C24.1 R8.1 | length 66.3
  Top Layer w10: R8.1 C24.1@942.33,1526
NetC24_2: C24.2 VR1.2 | length 468.1
  Top Layer w10: C24.2 VR1.2
NetC25_2: C25.2 R6.1 R8.2 U6.6 | length 320.5
  Top Layer w10: R6.1 690.65,1526 R8.2 ; R6.1@690.35,1529.43 C25.2 690.35,1404.56 700.67,1394.24 U6.6
NetD2_1: D2.1 R3.2 | length 74
  Top Layer w50: R3.2 D2.1
NetD3_1: D3.1 R4.2 | length 74.6
  Top Layer w50: R4.2 110.4,1439.64 110.4,1513.26 D3.1
NetF1_1: F1.1 P2.1 | length 257.2
  Top Layer w50: F1.1 380,310 465.79,224.21 475.63,224.21 485,214.84 P2.1@485,205
NetJ1_15: J1.15 R15.1 | length 110
  Top Layer w25: J1.15 R15.1
NetP3_1: P3.1 U4.3 U4.4
NetP3_2: P3.2 U4.1 U4.2
NetP4_1: P4.1 U5.1
NetP4_2: P4.2 R10.2
NetR2_1: R2.1 U1.44 | length 236.9
  Top Layer w10: U1.44 900.47,2237.47 R2.1
NetR9_2: R9.2 R11.2 R12.2 U5.4 U6.3 | length 1191
  Top Layer w10: U6.3 1037.76,1394.24 1088.51,1343.49 R12.2 R11.2 1281.49,1343.49 1415,1477 1548,1477 1582,1443 1582,1282 1582.12,1281.88 1582.12,1241 ; R9.2 1582.12,1241 ; U5.4 1582.12,1241
NetR10_1: R10.1 U5.2 | length 143
  Top Layer w60: R10.1 U5.2
NetR13_2: R13.2 R14.2 U6.5 | length 459.5
  Top Layer w10: U6.5 843.76,1444.24 871,1417 871,1228 834,1191 R13.2 794,1190 R14.2
NRST: C3.2 R1.1 SW1.1 U1.7 | length 682.8
  Top Layer w10: C3.2 SW1.1 348.7,1868.7 R1.1 453,1870 497.84,1825.16 U1.7
OSC_IN: C1.2 U1.5 X1.1 | length 326.5
  Top Layer w10: C1.2 X1.1 619.12,2019.46 679,1959.58 679,1905 719.47,1864.53 U1.5
OSC_OUT: C2.2 U1.6 X1.3 | length 392
  Top Layer w10: C2.2 X1.3 520.69,1910.69 586.55,1844.84 U1.6
SWCLK: P1.3 U1.37 | length 465.7
  Top Layer w10: U1.37 1038.27,2049.27 1077,2088 P1.3
SWDIO: P1.2 U1.34 | length 465.8
  Top Layer w10: U1.34 1131.1,1903.9 1198,1837 1340,1837 1374,1871 1374,1924 P1.2
VCC_9-12: C16.2 C17.2 D1.K F1.2 U3.3 | length 475.1
  Top Layer w25: D1.K 221.39,598.64 259.03,561 362.73,561 F1.2 397.26,578.27 415.28,596.28 415.28,668.01 407.4,675.88 C16.2@407.4,733.13 ; C16.2 407.4,836.07 U3.3
pads on no net: H1.1 H2.1 H3.1 H4.1 J1.7 J1.8 J1.9 J1.10 U1.2 U1.3 U1.4 U1.10 U1.11 U1.12 U1.13 U1.14 U1.15 U1.18 U1.19 U1.20 U1.21 U1.22 U1.25 U1.26 U1.27 U1.28 U1.29 U1.30 U1.31 U1.32 U1.33 U1.38 X1.2 X1.4

## Polygon pours and split planes (outlines as drawn)
VCC_9-12 on Top Layer "VCC_9-12_L01_P010" (solid, pour order 10): 188,614 188,653.89 255.61,654.68 256.22,614 364,614 388,651 389,882 445,882 445,544.02 188,545.78
+5 on Top Layer "+5_L01_P011" (solid, pour order 11): 387.88,1022 340,987 340,798 300,798 300,984 256,1028 257,1029 257,1112 285,1140 285,1279 364,1279 391,1303 392,1393 445,1393 445,1058
GND on Top Layer "GND_L01_P018" (solid, remove dead copper, pour order 18): 1724.68,1188 1720.89,1184.22 1004.82,1184.22 1004.82,672 588,672 588,-0.46 -0.32,-0.46 -0.32,2819.54 1724.68,2819.54
+3.3 on Top Layer "+3.3_L01_P012" (solid, pour order 12): 301,1302 301,1492 261,1536 261,1621 301,1666.22 301,1785 347,1785 389,1739 389,1536 349,1492 349,1302
GND on Bottom Layer "GND_L02_P017" (solid, remove dead copper, pour order 17): 1724.68,1188 1720.89,1184.22 1004.82,1184.22 1004.82,672 588,672 588,-0.46 -0.32,-0.46 -0.32,2819.54 1724.68,2819.54
+5 on Bottom Layer "+5_L02_P005" (solid, pour order 5): 509.49,689 119,689 119,1237 512.81,1237
+3.3 on Bottom Layer "+3.3_L02_P006" (solid, pour order 6): 508.9,1382 82,1382 82,1762 511.2,1762

## Keep-outs
Keep-Out Layer:
  lines w20: 0,0 0,2820 1725,2820 1725,425 1725,0 0,0

## Other copper
Top Layer:
  pour cut-out: 736.92,1475.64 942,1475.64 942,1262.84 736.92,1262.84
  pour cut-out: 725.28,2039.72 1134.72,2039.72 1134.72,1630.28 725.28,1630.28
  region net NetP3_2: 811,147 811,254 755,310 755,629 677,629 676,628 676,281 724,233 724,148.04
  region net NetP3_1: 853,629 853,427 1012,268 1012,147 923,147 923,251 776,398 776,629
  region net NetP4_1: 1400,147 1487,147 1489,145 1487,509.16 1555,575 1620,575 1620,646 1494,646 1399.04,551.04
  region net NetP4_2: 1199.1,143 1291,143 1291,450 1193,548 914,548 914,489 1128,489 1199.1,417.9
Bottom Layer:
  pour cut-out: 725.28,2039.72 1134.72,2039.72 1134.72,1630.28 725.28,1630.28

## Silkscreen, mask and mechanical layers (free items; w line width, h text height)
Top Overlay:
  lines w5: 65.55,1843.11 65.55,1984.84 134.45,1984.84 134.45,1843.11 65.55,1843.11 ; 209.24,1723.31 209.24,1792.21 350.97,1792.21 350.97,1723.31 209.24,1723.31 ; 209.79,1214.94 209.79,1283.83 351.53,1283.83 351.53,1214.94 209.79,1214.94 ; 217.67,1134.06 217.67,1202.96 343.65,1202.96 343.65,1134.06 217.67,1134.06 ; 224.99,1642.44 224.99,1711.33 350.97,1711.33 350.97,1642.44 224.99,1642.44 ; 299.13,625.68 299.13,694.58 440.87,694.58 440.87,625.68 299.13,625.68 ; 307.01,706.56 307.01,775.46 432.99,775.46 432.99,706.56 307.01,706.56 ; 406.29,1926.94 406.29,2052.93 475.19,2052.93 475.19,1926.94 406.29,1926.94 ; 489.84,854.3 489.84,923.2 615.83,923.2 615.83,854.3 489.84,854.3 ; 494.58,1643.42 494.58,1769.41 563.48,1769.41 563.48,1643.42 494.58,1643.42 ; 506.92,2059 632.9,2059 632.9,2127.9 506.92,2127.9 506.92,2059 ; 555.79,664.13 555.79,805.87 624.68,805.87 624.68,664.13 555.79,664.13 ; 575.45,1643.42 575.45,1769.41 644.35,1769.41 644.35,1643.42 575.45,1643.42 ; 644.88,2059.68 788.74,2059.68 788.74,2128.57 644.88,2128.57 644.88,2059.68 ; 644.88,2140.55 770.86,2140.55 770.86,2209.45 644.88,2209.45 644.88,2140.55 ; 839.13,1071.49 984.13,1071.49 984.13,1140.39 839.13,1140.39 839.13,1071.49 ; 907.55,664.13 907.55,805.87 976.45,805.87 976.45,664.13 907.55,664.13 ; 923.49,1491.55 1049.48,1491.55 1049.48,1560.45 923.49,1560.45 923.49,1491.55 ; 1153.83,1552.68 1153.83,1694.41 1222.72,1694.41 1222.72,1552.68 1153.83,1552.68 ; 1185.76,1909.55 1185.76,1978.45 1329.62,1978.45 1329.62,1909.55 1185.76,1909.55 ; 1187.88,2005.41 1187.88,2074.31 1331.74,2074.31 1331.74,2005.41 1187.88,2005.41 ; 1234.7,1552.95 1234.7,1694.69 1303.6,1694.69 1303.6,1552.95 1234.7,1552.95 ; 1262.01,1207.55 1262.01,1276.45 1387.99,1276.45 1387.99,1207.55 1262.01,1207.55 ; 1403.86,2526.34 1545.59,2526.34 1545.59,2595.23 1403.86,2595.23 1403.86,2526.34 ; 1403.86,2607.21 1529.84,2607.21 1529.84,2676.11 1403.86,2676.11 1403.86,2607.21
  text "GND" at 1588,2156 h30 r90
  text "CLK" at 1588,2048 h30 r90
  text "DIO" at 1588,1945 h30 r90
  text "3.3" at 1588,1842 h30 r90
  text "3.3V" at 27,1701 h30
  text "VOLT" at 459,1279 h30
  text "5V" at 28.39,1260.63 h30
  text "CURR" at 463,1163 h30
  text "GND" at 248,23 h30
  text "12VDC" at 424,23 h30
  text "CURRENT MAX 8A" at 662.57,23 h30
  text "VOLTAGE MAX 250V" at 1110.08,23 h30

## Text inside footprints (layer, text, board x,y; h text height)
D2: Top Overlay "+" at 116.81,1265.75 h30 r180
D3: Top Overlay "+" at 121.81,1655.39 h30 r180
J1: Top Overlay "16" at 1595.2,2431.93 h40; Top Overlay "1" at 112.52,2431.93 h40